# EAGLE board TSL2561_Luminosity_Sensor_BOB-Panel-v10 (EAGLE 6.5.0), part 1 of 2
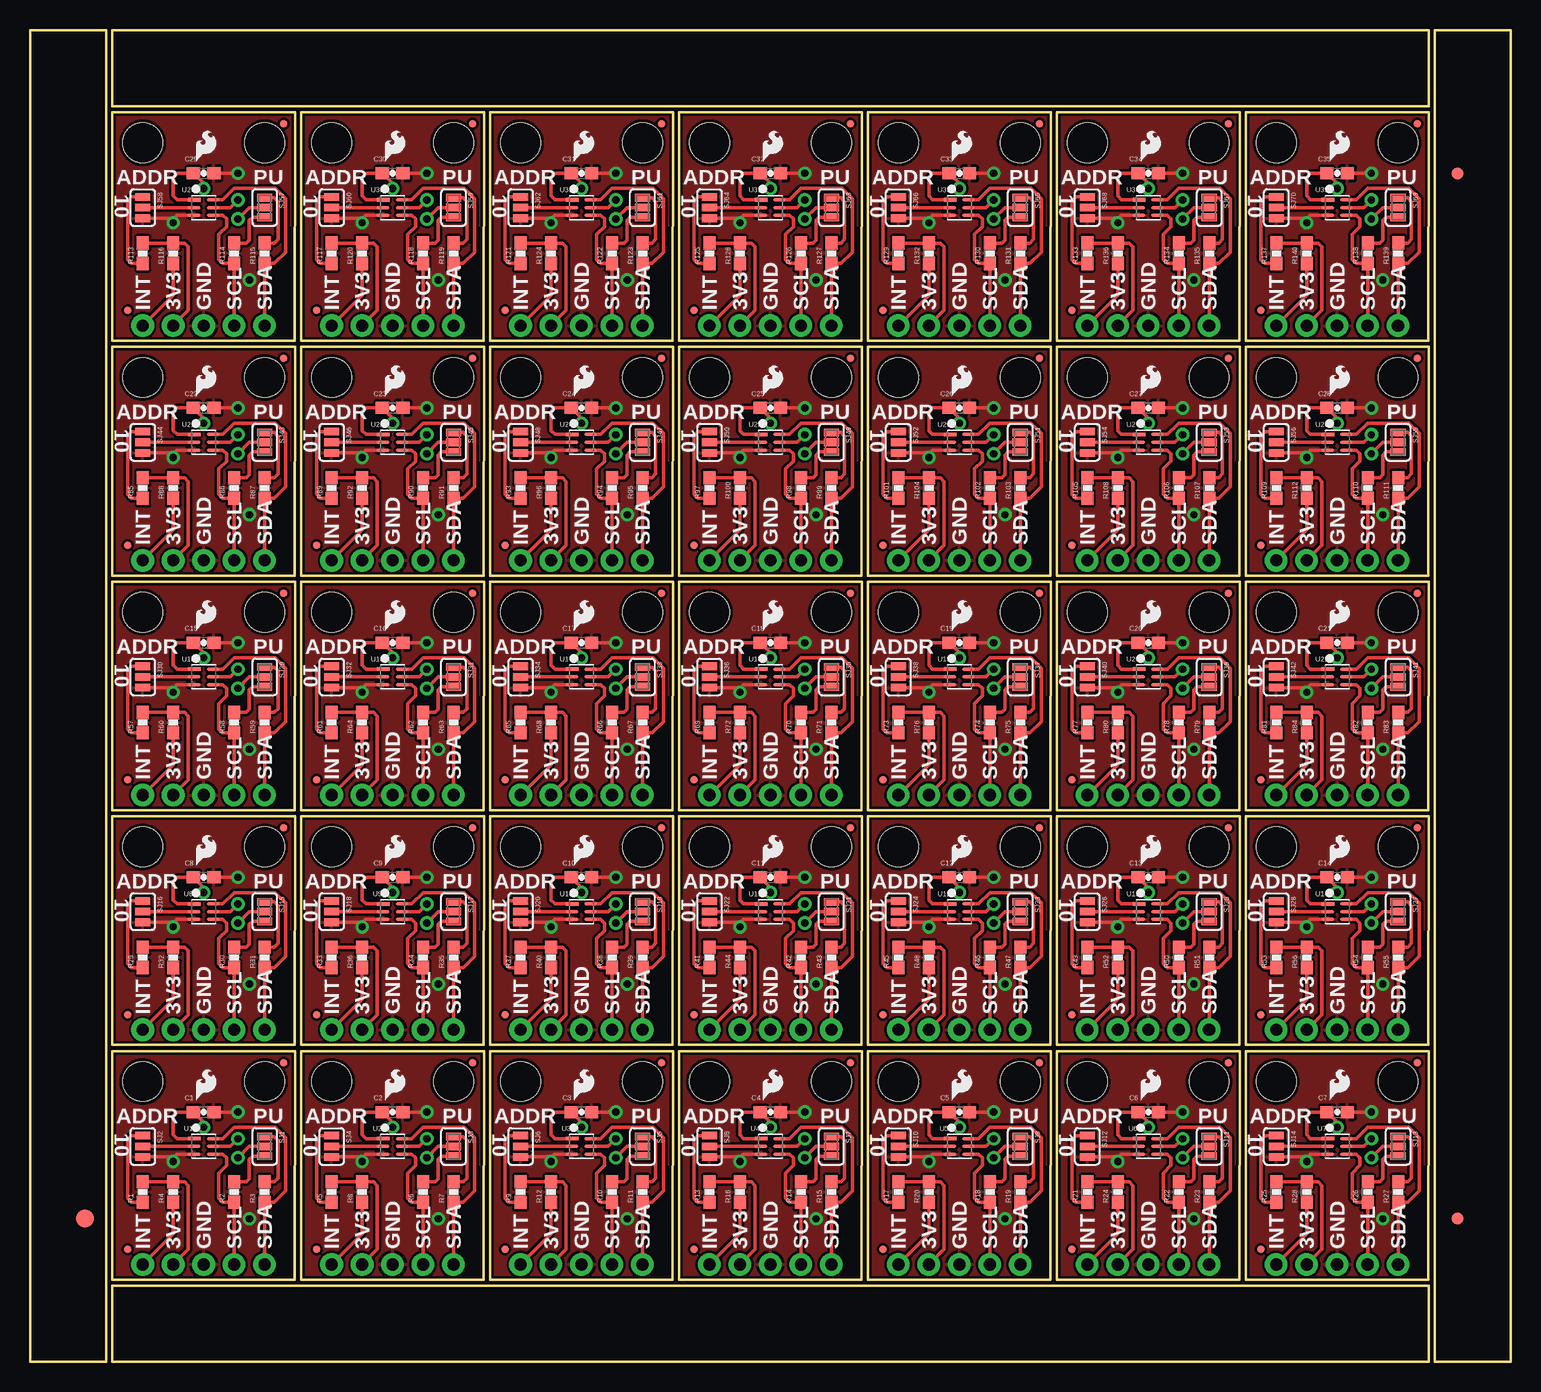
[diagram p0: board, top side]
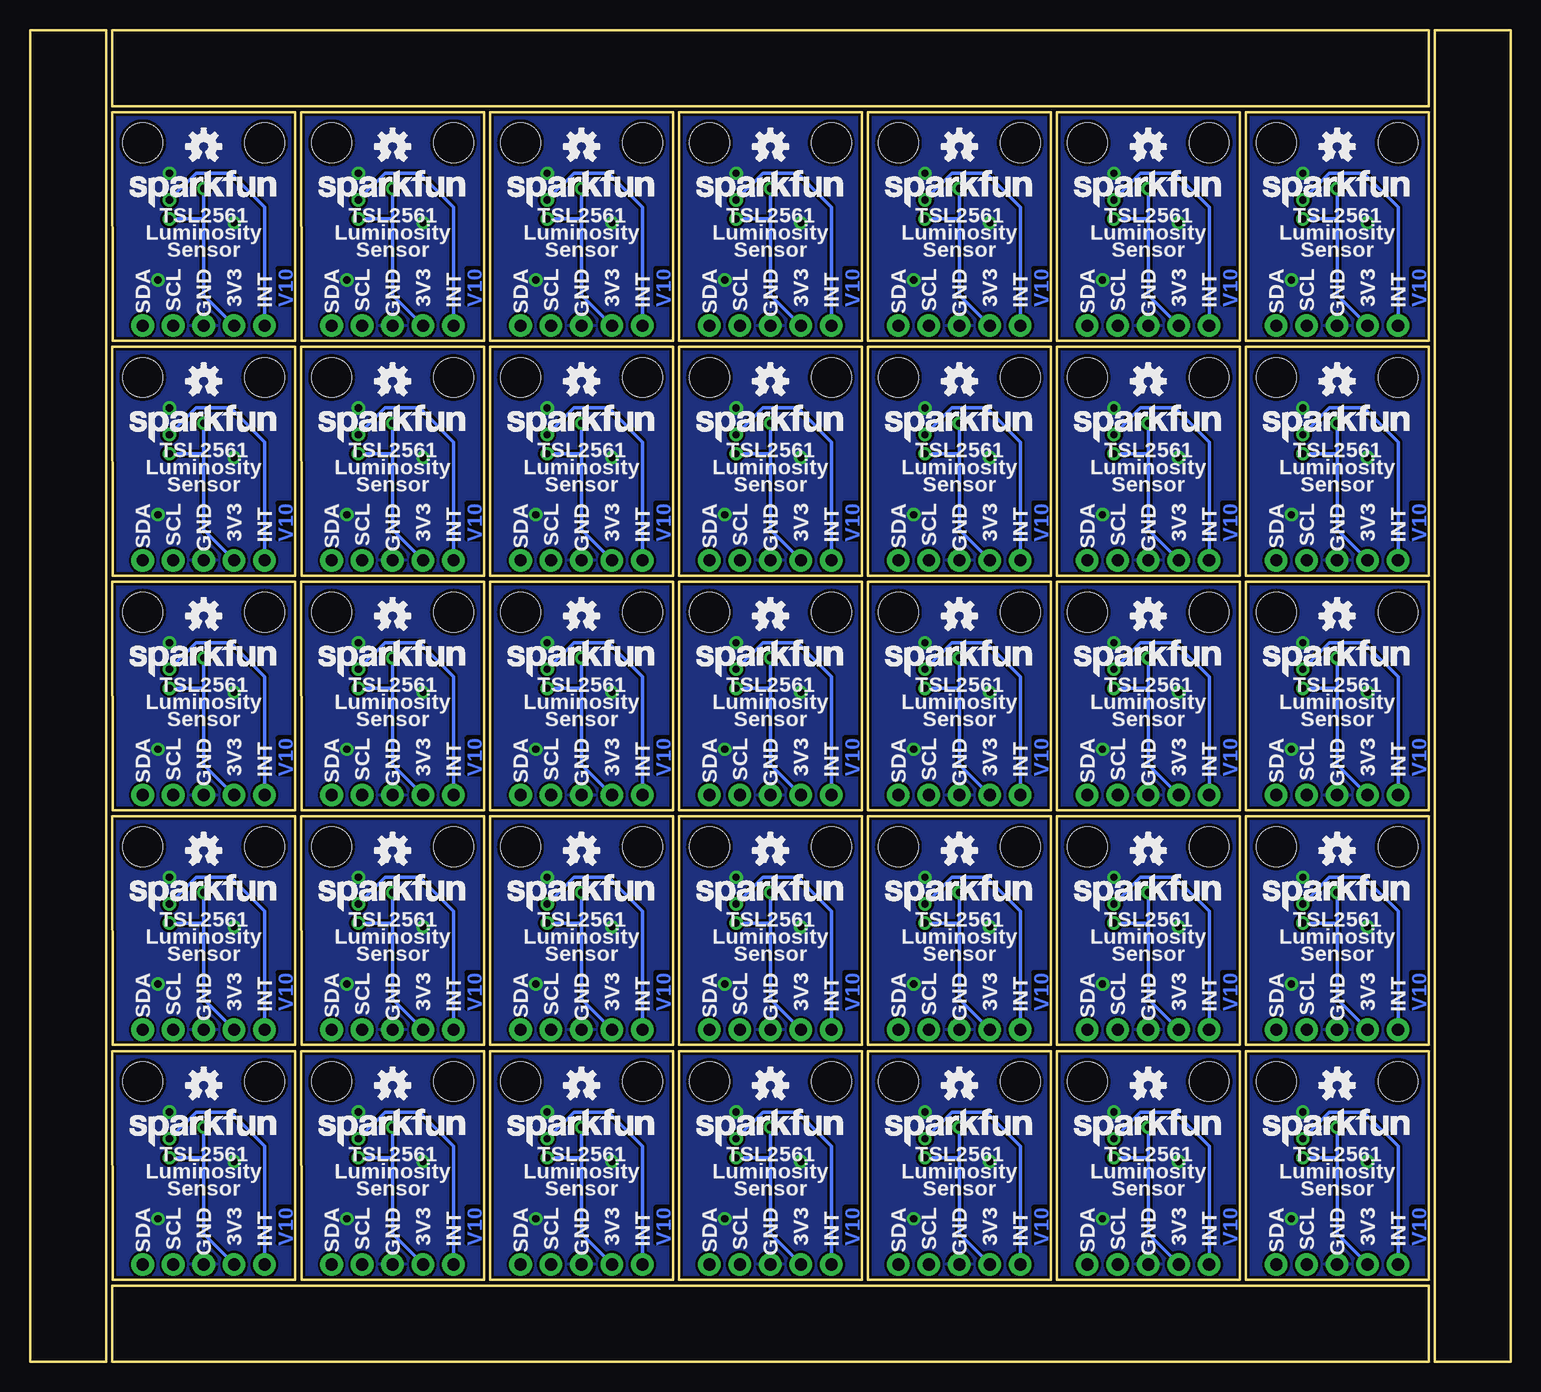
[diagram p1: board, bottom side, seen from below]

Size 123.44 x 111 mm. Coordinates in mm from the lower left corner, seen from the top.
Outline: 6.86,6.86 22.08,6.86 22.1,25.91 6.86,25.91 6.86,6.86
Outline: 22.61,6.86 37.83,6.86 37.85,25.91 22.61,25.91 22.61,6.86
Outline: 38.35,6.86 53.57,6.86 53.59,25.91 38.35,25.91 38.35,6.86
Outline: 54.1,6.86 69.32,6.86 69.34,25.91 54.1,25.91 54.1,6.86
Outline: 69.85,6.86 85.07,6.86 85.09,25.91 69.85,25.91 69.85,6.86
Outline: 85.6,6.86 100.82,6.86 100.84,25.91 85.6,25.91 85.6,6.86
Outline: 101.35,6.86 116.57,6.86 116.59,25.91 101.35,25.91 101.35,6.86
Outline: 6.86,26.42 22.08,26.42 22.1,45.47 6.86,45.47 6.86,26.42
Outline: 22.61,26.42 37.83,26.42 37.85,45.47 22.61,45.47 22.61,26.42
Outline: 38.35,26.42 53.57,26.42 53.59,45.47 38.35,45.47 38.35,26.42
Outline: 54.1,26.42 69.32,26.42 69.34,45.47 54.1,45.47 54.1,26.42
Outline: 69.85,26.42 85.07,26.42 85.09,45.47 69.85,45.47 69.85,26.42
Outline: 85.6,26.42 100.82,26.42 100.84,45.47 85.6,45.47 85.6,26.42
Outline: 101.35,26.42 116.57,26.42 116.59,45.47 101.35,45.47 101.35,26.42
Outline: 6.86,45.97 22.08,45.97 22.1,65.02 6.86,65.02 6.86,45.97
Outline: 22.61,45.97 37.83,45.97 37.85,65.02 22.61,65.02 22.61,45.97
Outline: 38.35,45.97 53.57,45.97 53.59,65.02 38.35,65.02 38.35,45.97
Outline: 54.1,45.97 69.32,45.97 69.34,65.02 54.1,65.02 54.1,45.97
Outline: 69.85,45.97 85.07,45.97 85.09,65.02 69.85,65.02 69.85,45.97
Outline: 85.6,45.97 100.82,45.97 100.84,65.02 85.6,65.02 85.6,45.97
Outline: 101.35,45.97 116.57,45.97 116.59,65.02 101.35,65.02 101.35,45.97
Outline: 6.86,65.53 22.08,65.53 22.1,84.58 6.86,84.58 6.86,65.53
Outline: 22.61,65.53 37.83,65.53 37.85,84.58 22.61,84.58 22.61,65.53
Outline: 38.35,65.53 53.57,65.53 53.59,84.58 38.35,84.58 38.35,65.53
Outline: 54.1,65.53 69.32,65.53 69.34,84.58 54.1,84.58 54.1,65.53
Outline: 69.85,65.53 85.07,65.53 85.09,84.58 69.85,84.58 69.85,65.53
Outline: 85.6,65.53 100.82,65.53 100.84,84.58 85.6,84.58 85.6,65.53
Outline: 101.35,65.53 116.57,65.53 116.59,84.58 101.35,84.58 101.35,65.53
Outline: 6.86,85.09 22.08,85.09 22.1,104.14 6.86,104.14 6.86,85.09
Outline: 22.61,85.09 37.83,85.09 37.85,104.14 22.61,104.14 22.61,85.09
Outline: 38.35,85.09 53.57,85.09 53.59,104.14 38.35,104.14 38.35,85.09
Outline: 54.1,85.09 69.32,85.09 69.34,104.14 54.1,104.14 54.1,85.09
Outline: 69.85,85.09 85.07,85.09 85.09,104.14 69.85,104.14 69.85,85.09
Outline: 85.6,85.09 100.82,85.09 100.84,104.14 85.6,104.14 85.6,85.09
Outline: 101.35,85.09 116.57,85.09 116.59,104.14 101.35,104.14 101.35,85.09
Outline: 6.35,0 6.35,111 0,111 0,0 6.35,0
Outline: 6.86,0 116.59,0 116.59,6.35 6.86,6.35 6.86,0
Outline: 123.44,0 123.44,111 117.09,111 117.09,0 123.44,0
Outline: 116.59,111 6.86,111 6.86,104.65 116.59,104.65 116.59,111
Copper layers (1*16): Top 0.035mm / dielectric 1.5mm / Bottom 0.035mm
Design rules "SparkFun": minimum track width 7mil, minimum drill 15mil, track to track 8mil, track to pad 8mil, pad to pad 8mil, via to via 8mil, smd to smd 8mil, copper to edge 8mil, drill to drill 8mil, minimum pad ring 12mil, minimum via ring 10mil, stop-mask expansion 4mil, vias tented up to drill 20mil, thermal gap 10mil

## Footprints (pad centres in the part's own frame; a part is rotated, then mirrored left to right if it is on the bottom)
0603-CAP = smd 1.1 x 1: 1 -0.85,0; 2 0.85,0
FIDUCIAL-1.5X3 = smd 1.5 x 1.5: 1 0,0
FIDUCIAL-1X2 = smd 1 x 1: 1 0,0
MICRO-FIDUCIAL = smd 0.635 x 0.635: 1 0,0
1X05_ROUNDONLY_NOSILK = drill 1.016 pad 1.88: 1 0,0; 2 2.54,0; 3 5.08,0; 4 7.62,0; 5 10.16,0
0603-RES = smd 1.1 x 1: 1 -0.85,0; 2 0.85,0
SJ_3_PASTE1&2&3 = smd 0.635 x 1.27: 1 -0.813,0; 2 0,0; 3 0.813,0
SJ_3 = smd 0.635 x 1.27: 1 -0.889,0; 2 0,0; 3 0.889,0
STAND-OFF = hole 3.302: 0,0
FN-6 = smd 1.05 x 0.3: 1 -0.775,0.65; 2 -0.775,0; 3 -0.775,-0.65; 4 0.775,-0.65; 5 0.775,0; 6 0.775,0.65

## Placement (x,y rotation side)
C1  0.1uF  [0603-CAP]  14.48,20.83 0 top
C2  0.1uF  [0603-CAP]  30.23,20.83 0 top
C3  0.1uF  [0603-CAP]  45.97,20.83 0 top
C4  0.1uF  [0603-CAP]  61.72,20.83 0 top
C5  0.1uF  [0603-CAP]  77.47,20.83 0 top
C6  0.1uF  [0603-CAP]  93.22,20.83 0 top
C7  0.1uF  [0603-CAP]  108.97,20.83 0 top
C8  0.1uF  [0603-CAP]  14.48,40.39 0 top
C9  0.1uF  [0603-CAP]  30.23,40.39 0 top
C10  0.1uF  [0603-CAP]  45.97,40.39 0 top
C11  0.1uF  [0603-CAP]  61.72,40.39 0 top
C12  0.1uF  [0603-CAP]  77.47,40.39 0 top
C13  0.1uF  [0603-CAP]  93.22,40.39 0 top
C14  0.1uF  [0603-CAP]  108.97,40.39 0 top
C15  0.1uF  [0603-CAP]  14.48,59.94 0 top
C16  0.1uF  [0603-CAP]  30.23,59.94 0 top
C17  0.1uF  [0603-CAP]  45.97,59.94 0 top
C18  0.1uF  [0603-CAP]  61.72,59.94 0 top
C19  0.1uF  [0603-CAP]  77.47,59.94 0 top
C20  0.1uF  [0603-CAP]  93.22,59.94 0 top
C21  0.1uF  [0603-CAP]  108.97,59.94 0 top
C22  0.1uF  [0603-CAP]  14.48,79.5 0 top
C23  0.1uF  [0603-CAP]  30.23,79.5 0 top
C24  0.1uF  [0603-CAP]  45.97,79.5 0 top
C25  0.1uF  [0603-CAP]  61.72,79.5 0 top
C26  0.1uF  [0603-CAP]  77.47,79.5 0 top
C27  0.1uF  [0603-CAP]  93.22,79.5 0 top
C28  0.1uF  [0603-CAP]  108.97,79.5 0 top
C29  0.1uF  [0603-CAP]  14.48,99.06 0 top
C30  0.1uF  [0603-CAP]  30.23,99.06 0 top
C31  0.1uF  [0603-CAP]  45.97,99.06 0 top
C32  0.1uF  [0603-CAP]  61.72,99.06 0 top
C33  0.1uF  [0603-CAP]  77.47,99.06 0 top
C34  0.1uF  [0603-CAP]  93.22,99.06 0 top
C35  0.1uF  [0603-CAP]  108.97,99.06 0 top
E$1  [FIDUCIAL-1.5X3]  4.57,11.94 0 top
E$4  [FIDUCIAL-1X2]  119,11.94 0 top
E$5  [FIDUCIAL-1X2]  119,99.06 180 top
FID1  FIDUCIALUFIDUCIAL  [MICRO-FIDUCIAL]  8.13,9.4 0 top
FID2  FIDUCIALUFIDUCIAL  [MICRO-FIDUCIAL]  21.15,24.96 0 top
FID3  FIDUCIALUFIDUCIAL  [MICRO-FIDUCIAL]  23.88,9.4 0 top
FID4  FIDUCIALUFIDUCIAL  [MICRO-FIDUCIAL]  36.89,24.96 0 top
FID5  FIDUCIALUFIDUCIAL  [MICRO-FIDUCIAL]  39.62,9.4 0 top
FID6  FIDUCIALUFIDUCIAL  [MICRO-FIDUCIAL]  52.64,24.96 0 top
FID7  FIDUCIALUFIDUCIAL  [MICRO-FIDUCIAL]  55.37,9.4 0 top
FID8  FIDUCIALUFIDUCIAL  [MICRO-FIDUCIAL]  68.39,24.96 0 top
FID9  FIDUCIALUFIDUCIAL  [MICRO-FIDUCIAL]  71.12,9.4 0 top
FID10  FIDUCIALUFIDUCIAL  [MICRO-FIDUCIAL]  84.14,24.96 0 top
FID11  FIDUCIALUFIDUCIAL  [MICRO-FIDUCIAL]  86.87,9.4 0 top
FID12  FIDUCIALUFIDUCIAL  [MICRO-FIDUCIAL]  99.89,24.96 0 top
FID13  FIDUCIALUFIDUCIAL  [MICRO-FIDUCIAL]  102.62,9.4 0 top
FID14  FIDUCIALUFIDUCIAL  [MICRO-FIDUCIAL]  115.63,24.96 0 top
FID15  FIDUCIALUFIDUCIAL  [MICRO-FIDUCIAL]  8.13,28.96 0 top
FID16  FIDUCIALUFIDUCIAL  [MICRO-FIDUCIAL]  21.15,44.51 0 top
FID17  FIDUCIALUFIDUCIAL  [MICRO-FIDUCIAL]  23.88,28.96 0 top
FID18  FIDUCIALUFIDUCIAL  [MICRO-FIDUCIAL]  36.89,44.51 0 top
FID19  FIDUCIALUFIDUCIAL  [MICRO-FIDUCIAL]  39.62,28.96 0 top
FID20  FIDUCIALUFIDUCIAL  [MICRO-FIDUCIAL]  52.64,44.51 0 top
FID21  FIDUCIALUFIDUCIAL  [MICRO-FIDUCIAL]  55.37,28.96 0 top
FID22  FIDUCIALUFIDUCIAL  [MICRO-FIDUCIAL]  68.39,44.51 0 top
FID23  FIDUCIALUFIDUCIAL  [MICRO-FIDUCIAL]  71.12,28.96 0 top
FID24  FIDUCIALUFIDUCIAL  [MICRO-FIDUCIAL]  84.14,44.51 0 top
FID25  FIDUCIALUFIDUCIAL  [MICRO-FIDUCIAL]  86.87,28.96 0 top
FID26  FIDUCIALUFIDUCIAL  [MICRO-FIDUCIAL]  99.89,44.51 0 top
FID27  FIDUCIALUFIDUCIAL  [MICRO-FIDUCIAL]  102.62,28.96 0 top
FID28  FIDUCIALUFIDUCIAL  [MICRO-FIDUCIAL]  115.63,44.51 0 top
FID29  FIDUCIALUFIDUCIAL  [MICRO-FIDUCIAL]  8.13,48.51 0 top
FID30  FIDUCIALUFIDUCIAL  [MICRO-FIDUCIAL]  21.15,64.07 0 top
FID31  FIDUCIALUFIDUCIAL  [MICRO-FIDUCIAL]  23.88,48.51 0 top
FID32  FIDUCIALUFIDUCIAL  [MICRO-FIDUCIAL]  36.89,64.07 0 top
FID33  FIDUCIALUFIDUCIAL  [MICRO-FIDUCIAL]  39.62,48.51 0 top
FID34  FIDUCIALUFIDUCIAL  [MICRO-FIDUCIAL]  52.64,64.07 0 top
FID35  FIDUCIALUFIDUCIAL  [MICRO-FIDUCIAL]  55.37,48.51 0 top
FID36  FIDUCIALUFIDUCIAL  [MICRO-FIDUCIAL]  68.39,64.07 0 top
FID37  FIDUCIALUFIDUCIAL  [MICRO-FIDUCIAL]  71.12,48.51 0 top
FID38  FIDUCIALUFIDUCIAL  [MICRO-FIDUCIAL]  84.14,64.07 0 top
FID39  FIDUCIALUFIDUCIAL  [MICRO-FIDUCIAL]  86.87,48.51 0 top
FID40  FIDUCIALUFIDUCIAL  [MICRO-FIDUCIAL]  99.89,64.07 0 top
FID41  FIDUCIALUFIDUCIAL  [MICRO-FIDUCIAL]  102.62,48.51 0 top
FID42  FIDUCIALUFIDUCIAL  [MICRO-FIDUCIAL]  115.63,64.07 0 top
FID43  FIDUCIALUFIDUCIAL  [MICRO-FIDUCIAL]  8.13,68.07 0 top
FID44  FIDUCIALUFIDUCIAL  [MICRO-FIDUCIAL]  21.15,83.63 0 top
FID45  FIDUCIALUFIDUCIAL  [MICRO-FIDUCIAL]  23.88,68.07 0 top
FID46  FIDUCIALUFIDUCIAL  [MICRO-FIDUCIAL]  36.89,83.63 0 top
FID47  FIDUCIALUFIDUCIAL  [MICRO-FIDUCIAL]  39.62,68.07 0 top
FID48  FIDUCIALUFIDUCIAL  [MICRO-FIDUCIAL]  52.64,83.63 0 top
FID49  FIDUCIALUFIDUCIAL  [MICRO-FIDUCIAL]  55.37,68.07 0 top
FID50  FIDUCIALUFIDUCIAL  [MICRO-FIDUCIAL]  68.39,83.63 0 top
FID51  FIDUCIALUFIDUCIAL  [MICRO-FIDUCIAL]  71.12,68.07 0 top
FID52  FIDUCIALUFIDUCIAL  [MICRO-FIDUCIAL]  84.14,83.63 0 top
FID53  FIDUCIALUFIDUCIAL  [MICRO-FIDUCIAL]  86.87,68.07 0 top
FID54  FIDUCIALUFIDUCIAL  [MICRO-FIDUCIAL]  99.89,83.63 0 top
FID55  FIDUCIALUFIDUCIAL  [MICRO-FIDUCIAL]  102.62,68.07 0 top
FID56  FIDUCIALUFIDUCIAL  [MICRO-FIDUCIAL]  115.63,83.63 0 top
FID57  FIDUCIALUFIDUCIAL  [MICRO-FIDUCIAL]  8.13,87.63 0 top
FID58  FIDUCIALUFIDUCIAL  [MICRO-FIDUCIAL]  21.15,103.19 0 top
FID59  FIDUCIALUFIDUCIAL  [MICRO-FIDUCIAL]  23.88,87.63 0 top
FID60  FIDUCIALUFIDUCIAL  [MICRO-FIDUCIAL]  36.89,103.19 0 top
FID61  FIDUCIALUFIDUCIAL  [MICRO-FIDUCIAL]  39.62,87.63 0 top
FID62  FIDUCIALUFIDUCIAL  [MICRO-FIDUCIAL]  52.64,103.19 0 top
FID63  FIDUCIALUFIDUCIAL  [MICRO-FIDUCIAL]  55.37,87.63 0 top
FID64  FIDUCIALUFIDUCIAL  [MICRO-FIDUCIAL]  68.39,103.19 0 top
FID65  FIDUCIALUFIDUCIAL  [MICRO-FIDUCIAL]  71.12,87.63 0 top
FID66  FIDUCIALUFIDUCIAL  [MICRO-FIDUCIAL]  84.14,103.19 0 top
FID67  FIDUCIALUFIDUCIAL  [MICRO-FIDUCIAL]  86.87,87.63 0 top
FID68  FIDUCIALUFIDUCIAL  [MICRO-FIDUCIAL]  99.89,103.19 0 top
FID69  FIDUCIALUFIDUCIAL  [MICRO-FIDUCIAL]  102.62,87.63 0 top
FID70  FIDUCIALUFIDUCIAL  [MICRO-FIDUCIAL]  115.63,103.19 0 top
JP1  [1X05_ROUNDONLY_NOSILK]  19.56,8.13 180 top
JP2  [1X05_ROUNDONLY_NOSILK]  35.31,8.13 180 top
JP3  [1X05_ROUNDONLY_NOSILK]  51.05,8.13 180 top
JP4  [1X05_ROUNDONLY_NOSILK]  66.8,8.13 180 top
JP5  [1X05_ROUNDONLY_NOSILK]  82.55,8.13 180 top
JP6  [1X05_ROUNDONLY_NOSILK]  98.3,8.13 180 top
JP7  [1X05_ROUNDONLY_NOSILK]  114.05,8.13 180 top
JP8  [1X05_ROUNDONLY_NOSILK]  19.56,27.69 180 top
JP9  [1X05_ROUNDONLY_NOSILK]  35.31,27.69 180 top
JP10  [1X05_ROUNDONLY_NOSILK]  51.05,27.69 180 top
JP11  [1X05_ROUNDONLY_NOSILK]  66.8,27.69 180 top
JP12  [1X05_ROUNDONLY_NOSILK]  82.55,27.69 180 top
JP13  [1X05_ROUNDONLY_NOSILK]  98.3,27.69 180 top
JP14  [1X05_ROUNDONLY_NOSILK]  114.05,27.69 180 top
JP15  [1X05_ROUNDONLY_NOSILK]  19.56,47.24 180 top
JP16  [1X05_ROUNDONLY_NOSILK]  35.31,47.24 180 top
JP17  [1X05_ROUNDONLY_NOSILK]  51.05,47.24 180 top
JP18  [1X05_ROUNDONLY_NOSILK]  66.8,47.24 180 top
JP19  [1X05_ROUNDONLY_NOSILK]  82.55,47.24 180 top
JP20  [1X05_ROUNDONLY_NOSILK]  98.3,47.24 180 top
JP21  [1X05_ROUNDONLY_NOSILK]  114.05,47.24 180 top
JP22  [1X05_ROUNDONLY_NOSILK]  19.56,66.8 180 top
JP23  [1X05_ROUNDONLY_NOSILK]  35.31,66.8 180 top
JP24  [1X05_ROUNDONLY_NOSILK]  51.05,66.8 180 top
JP25  [1X05_ROUNDONLY_NOSILK]  66.8,66.8 180 top
JP26  [1X05_ROUNDONLY_NOSILK]  82.55,66.8 180 top
JP27  [1X05_ROUNDONLY_NOSILK]  98.3,66.8 180 top
JP28  [1X05_ROUNDONLY_NOSILK]  114.05,66.8 180 top
JP29  [1X05_ROUNDONLY_NOSILK]  19.56,86.36 180 top
JP30  [1X05_ROUNDONLY_NOSILK]  35.31,86.36 180 top
JP31  [1X05_ROUNDONLY_NOSILK]  51.05,86.36 180 top
JP32  [1X05_ROUNDONLY_NOSILK]  66.8,86.36 180 top
JP33  [1X05_ROUNDONLY_NOSILK]  82.55,86.36 180 top
JP34  [1X05_ROUNDONLY_NOSILK]  98.3,86.36 180 top
JP35  [1X05_ROUNDONLY_NOSILK]  114.05,86.36 180 top
LOGO1  OSHW-LOGOS  [OSHW-LOGO-S]  14.48,23.05 0 bottom
LOGO2  LOGO-SFENW2  [SFE-NEW-WEB]  20.67,17.97 0 bottom
LOGO3  SFE_LOGO_FLAME.1_INCH  [SFE_LOGO_FLAME_.1]  13.53,21.46 0 top
LOGO4  OSHW-LOGOS  [OSHW-LOGO-S]  30.23,23.05 0 bottom
LOGO5  LOGO-SFENW2  [SFE-NEW-WEB]  36.42,17.97 0 bottom
LOGO6  SFE_LOGO_FLAME.1_INCH  [SFE_LOGO_FLAME_.1]  29.27,21.46 0 top
LOGO7  OSHW-LOGOS  [OSHW-LOGO-S]  45.97,23.05 0 bottom
LOGO8  LOGO-SFENW2  [SFE-NEW-WEB]  52.17,17.97 0 bottom
LOGO9  SFE_LOGO_FLAME.1_INCH  [SFE_LOGO_FLAME_.1]  45.02,21.46 0 top
LOGO10  OSHW-LOGOS  [OSHW-LOGO-S]  61.72,23.05 0 bottom
LOGO11  LOGO-SFENW2  [SFE-NEW-WEB]  67.91,17.97 0 bottom
LOGO12  SFE_LOGO_FLAME.1_INCH  [SFE_LOGO_FLAME_.1]  60.77,21.46 0 top
LOGO13  OSHW-LOGOS  [OSHW-LOGO-S]  77.47,23.05 0 bottom
LOGO14  LOGO-SFENW2  [SFE-NEW-WEB]  83.66,17.97 0 bottom
LOGO15  SFE_LOGO_FLAME.1_INCH  [SFE_LOGO_FLAME_.1]  76.52,21.46 0 top
LOGO16  OSHW-LOGOS  [OSHW-LOGO-S]  93.22,23.05 0 bottom
LOGO17  LOGO-SFENW2  [SFE-NEW-WEB]  99.41,17.97 0 bottom
LOGO18  SFE_LOGO_FLAME.1_INCH  [SFE_LOGO_FLAME_.1]  92.27,21.46 0 top
LOGO19  OSHW-LOGOS  [OSHW-LOGO-S]  108.97,23.05 0 bottom
LOGO20  LOGO-SFENW2  [SFE-NEW-WEB]  115.16,17.97 0 bottom
LOGO21  SFE_LOGO_FLAME.1_INCH  [SFE_LOGO_FLAME_.1]  108.01,21.46 0 top
LOGO22  OSHW-LOGOS  [OSHW-LOGO-S]  14.48,42.61 0 bottom
LOGO23  LOGO-SFENW2  [SFE-NEW-WEB]  20.67,37.53 0 bottom
LOGO24  SFE_LOGO_FLAME.1_INCH  [SFE_LOGO_FLAME_.1]  13.53,41.02 0 top
LOGO25  OSHW-LOGOS  [OSHW-LOGO-S]  30.23,42.61 0 bottom
LOGO26  LOGO-SFENW2  [SFE-NEW-WEB]  36.42,37.53 0 bottom
LOGO27  SFE_LOGO_FLAME.1_INCH  [SFE_LOGO_FLAME_.1]  29.27,41.02 0 top
LOGO28  OSHW-LOGOS  [OSHW-LOGO-S]  45.97,42.61 0 bottom
LOGO29  LOGO-SFENW2  [SFE-NEW-WEB]  52.17,37.53 0 bottom
LOGO30  SFE_LOGO_FLAME.1_INCH  [SFE_LOGO_FLAME_.1]  45.02,41.02 0 top
LOGO31  OSHW-LOGOS  [OSHW-LOGO-S]  61.72,42.61 0 bottom
LOGO32  LOGO-SFENW2  [SFE-NEW-WEB]  67.91,37.53 0 bottom
LOGO33  SFE_LOGO_FLAME.1_INCH  [SFE_LOGO_FLAME_.1]  60.77,41.02 0 top
LOGO34  OSHW-LOGOS  [OSHW-LOGO-S]  77.47,42.61 0 bottom
LOGO35  LOGO-SFENW2  [SFE-NEW-WEB]  83.66,37.53 0 bottom
LOGO36  SFE_LOGO_FLAME.1_INCH  [SFE_LOGO_FLAME_.1]  76.52,41.02 0 top
LOGO37  OSHW-LOGOS  [OSHW-LOGO-S]  93.22,42.61 0 bottom
LOGO38  LOGO-SFENW2  [SFE-NEW-WEB]  99.41,37.53 0 bottom
LOGO39  SFE_LOGO_FLAME.1_INCH  [SFE_LOGO_FLAME_.1]  92.27,41.02 0 top
LOGO40  OSHW-LOGOS  [OSHW-LOGO-S]  108.97,42.61 0 bottom
LOGO41  LOGO-SFENW2  [SFE-NEW-WEB]  115.16,37.53 0 bottom
LOGO42  SFE_LOGO_FLAME.1_INCH  [SFE_LOGO_FLAME_.1]  108.01,41.02 0 top
LOGO43  OSHW-LOGOS  [OSHW-LOGO-S]  14.48,62.17 0 bottom
LOGO44  LOGO-SFENW2  [SFE-NEW-WEB]  20.67,57.09 0 bottom
LOGO45  SFE_LOGO_FLAME.1_INCH  [SFE_LOGO_FLAME_.1]  13.53,60.58 0 top
LOGO46  OSHW-LOGOS  [OSHW-LOGO-S]  30.23,62.17 0 bottom
LOGO47  LOGO-SFENW2  [SFE-NEW-WEB]  36.42,57.09 0 bottom
LOGO48  SFE_LOGO_FLAME.1_INCH  [SFE_LOGO_FLAME_.1]  29.27,60.58 0 top
LOGO49  OSHW-LOGOS  [OSHW-LOGO-S]  45.97,62.17 0 bottom
LOGO50  LOGO-SFENW2  [SFE-NEW-WEB]  52.17,57.09 0 bottom
LOGO51  SFE_LOGO_FLAME.1_INCH  [SFE_LOGO_FLAME_.1]  45.02,60.58 0 top
LOGO52  OSHW-LOGOS  [OSHW-LOGO-S]  61.72,62.17 0 bottom
LOGO53  LOGO-SFENW2  [SFE-NEW-WEB]  67.91,57.09 0 bottom
LOGO54  SFE_LOGO_FLAME.1_INCH  [SFE_LOGO_FLAME_.1]  60.77,60.58 0 top
LOGO55  OSHW-LOGOS  [OSHW-LOGO-S]  77.47,62.17 0 bottom
LOGO56  LOGO-SFENW2  [SFE-NEW-WEB]  83.66,57.09 0 bottom
LOGO57  SFE_LOGO_FLAME.1_INCH  [SFE_LOGO_FLAME_.1]  76.52,60.58 0 top
LOGO58  OSHW-LOGOS  [OSHW-LOGO-S]  93.22,62.17 0 bottom
LOGO59  LOGO-SFENW2  [SFE-NEW-WEB]  99.41,57.09 0 bottom
LOGO60  SFE_LOGO_FLAME.1_INCH  [SFE_LOGO_FLAME_.1]  92.27,60.58 0 top
LOGO61  OSHW-LOGOS  [OSHW-LOGO-S]  108.97,62.17 0 bottom
LOGO62  LOGO-SFENW2  [SFE-NEW-WEB]  115.16,57.09 0 bottom
LOGO63  SFE_LOGO_FLAME.1_INCH  [SFE_LOGO_FLAME_.1]  108.01,60.58 0 top
LOGO64  OSHW-LOGOS  [OSHW-LOGO-S]  14.48,81.72 0 bottom
LOGO65  LOGO-SFENW2  [SFE-NEW-WEB]  20.67,76.64 0 bottom
LOGO66  SFE_LOGO_FLAME.1_INCH  [SFE_LOGO_FLAME_.1]  13.53,80.14 0 top
LOGO67  OSHW-LOGOS  [OSHW-LOGO-S]  30.23,81.72 0 bottom
LOGO68  LOGO-SFENW2  [SFE-NEW-WEB]  36.42,76.64 0 bottom
LOGO69  SFE_LOGO_FLAME.1_INCH  [SFE_LOGO_FLAME_.1]  29.27,80.14 0 top
LOGO70  OSHW-LOGOS  [OSHW-LOGO-S]  45.97,81.72 0 bottom
LOGO71  LOGO-SFENW2  [SFE-NEW-WEB]  52.17,76.64 0 bottom
LOGO72  SFE_LOGO_FLAME.1_INCH  [SFE_LOGO_FLAME_.1]  45.02,80.14 0 top
LOGO73  OSHW-LOGOS  [OSHW-LOGO-S]  61.72,81.72 0 bottom
LOGO74  LOGO-SFENW2  [SFE-NEW-WEB]  67.91,76.64 0 bottom
LOGO75  SFE_LOGO_FLAME.1_INCH  [SFE_LOGO_FLAME_.1]  60.77,80.14 0 top
LOGO76  OSHW-LOGOS  [OSHW-LOGO-S]  77.47,81.72 0 bottom
LOGO77  LOGO-SFENW2  [SFE-NEW-WEB]  83.66,76.64 0 bottom
LOGO78  SFE_LOGO_FLAME.1_INCH  [SFE_LOGO_FLAME_.1]  76.52,80.14 0 top
LOGO79  OSHW-LOGOS  [OSHW-LOGO-S]  93.22,81.72 0 bottom
LOGO80  LOGO-SFENW2  [SFE-NEW-WEB]  99.41,76.64 0 bottom
LOGO81  SFE_LOGO_FLAME.1_INCH  [SFE_LOGO_FLAME_.1]  92.27,80.14 0 top
LOGO82  OSHW-LOGOS  [OSHW-LOGO-S]  108.97,81.72 0 bottom
LOGO83  LOGO-SFENW2  [SFE-NEW-WEB]  115.16,76.64 0 bottom
LOGO84  SFE_LOGO_FLAME.1_INCH  [SFE_LOGO_FLAME_.1]  108.01,80.14 0 top
LOGO85  OSHW-LOGOS  [OSHW-LOGO-S]  14.48,101.28 0 bottom
LOGO86  LOGO-SFENW2  [SFE-NEW-WEB]  20.67,96.2 0 bottom
LOGO87  SFE_LOGO_FLAME.1_INCH  [SFE_LOGO_FLAME_.1]  13.53,99.69 0 top
LOGO88  OSHW-LOGOS  [OSHW-LOGO-S]  30.23,101.28 0 bottom
LOGO89  LOGO-SFENW2  [SFE-NEW-WEB]  36.42,96.2 0 bottom
LOGO90  SFE_LOGO_FLAME.1_INCH  [SFE_LOGO_FLAME_.1]  29.27,99.69 0 top
LOGO91  OSHW-LOGOS  [OSHW-LOGO-S]  45.97,101.28 0 bottom
LOGO92  LOGO-SFENW2  [SFE-NEW-WEB]  52.17,96.2 0 bottom
LOGO93  SFE_LOGO_FLAME.1_INCH  [SFE_LOGO_FLAME_.1]  45.02,99.69 0 top
LOGO94  OSHW-LOGOS  [OSHW-LOGO-S]  61.72,101.28 0 bottom
LOGO95  LOGO-SFENW2  [SFE-NEW-WEB]  67.91,96.2 0 bottom
LOGO96  SFE_LOGO_FLAME.1_INCH  [SFE_LOGO_FLAME_.1]  60.77,99.69 0 top
LOGO97  OSHW-LOGOS  [OSHW-LOGO-S]  77.47,101.28 0 bottom
LOGO98  LOGO-SFENW2  [SFE-NEW-WEB]  83.66,96.2 0 bottom
LOGO99  SFE_LOGO_FLAME.1_INCH  [SFE_LOGO_FLAME_.1]  76.52,99.69 0 top
LOGO100  OSHW-LOGOS  [OSHW-LOGO-S]  93.22,101.28 0 bottom
LOGO101  LOGO-SFENW2  [SFE-NEW-WEB]  99.41,96.2 0 bottom
LOGO102  SFE_LOGO_FLAME.1_INCH  [SFE_LOGO_FLAME_.1]  92.27,99.69 0 top
LOGO103  OSHW-LOGOS  [OSHW-LOGO-S]  108.97,101.28 0 bottom
LOGO104  LOGO-SFENW2  [SFE-NEW-WEB]  115.16,96.2 0 bottom
LOGO105  SFE_LOGO_FLAME.1_INCH  [SFE_LOGO_FLAME_.1]  108.01,99.69 0 top
R1  10K  [0603-RES]  9.4,14.16 90 top
R2  4.7K  [0603-RES]  17.02,14.16 90 top
R3  4.7K  [0603-RES]  19.56,14.16 90 top
R4  10K  [0603-RES]  11.94,14.16 90 top
R5  10K  [0603-RES]  25.15,14.16 90 top
R6  4.7K  [0603-RES]  32.77,14.16 90 top
R7  4.7K  [0603-RES]  35.31,14.16 90 top
R8  10K  [0603-RES]  27.69,14.16 90 top
R9  10K  [0603-RES]  40.89,14.16 90 top
R10  4.7K  [0603-RES]  48.51,14.16 90 top
R11  4.7K  [0603-RES]  51.05,14.16 90 top
R12  10K  [0603-RES]  43.43,14.16 90 top
R13  10K  [0603-RES]  56.64,14.16 90 top
R14  4.7K  [0603-RES]  64.26,14.16 90 top
R15  4.7K  [0603-RES]  66.8,14.16 90 top
R16  10K  [0603-RES]  59.18,14.16 90 top
R17  10K  [0603-RES]  72.39,14.16 90 top
R18  4.7K  [0603-RES]  80.01,14.16 90 top
R19  4.7K  [0603-RES]  82.55,14.16 90 top
R20  10K  [0603-RES]  74.93,14.16 90 top
R21  10K  [0603-RES]  88.14,14.16 90 top
R22  4.7K  [0603-RES]  95.76,14.16 90 top
R23  4.7K  [0603-RES]  98.3,14.16 90 top
R24  10K  [0603-RES]  90.68,14.16 90 top
R25  10K  [0603-RES]  103.89,14.16 90 top
R26  4.7K  [0603-RES]  111.51,14.16 90 top
R27  4.7K  [0603-RES]  114.05,14.16 90 top
R28  10K  [0603-RES]  106.43,14.16 90 top
R29  10K  [0603-RES]  9.4,33.72 90 top
R30  4.7K  [0603-RES]  17.02,33.72 90 top
R31  4.7K  [0603-RES]  19.56,33.72 90 top
R32  10K  [0603-RES]  11.94,33.72 90 top
R33  10K  [0603-RES]  25.15,33.72 90 top
R34  4.7K  [0603-RES]  32.77,33.72 90 top
R35  4.7K  [0603-RES]  35.31,33.72 90 top
R36  10K  [0603-RES]  27.69,33.72 90 top
R37  10K  [0603-RES]  40.89,33.72 90 top
R38  4.7K  [0603-RES]  48.51,33.72 90 top
R39  4.7K  [0603-RES]  51.05,33.72 90 top
R40  10K  [0603-RES]  43.43,33.72 90 top
R41  10K  [0603-RES]  56.64,33.72 90 top
R42  4.7K  [0603-RES]  64.26,33.72 90 top
R43  4.7K  [0603-RES]  66.8,33.72 90 top
R44  10K  [0603-RES]  59.18,33.72 90 top
R45  10K  [0603-RES]  72.39,33.72 90 top
R46  4.7K  [0603-RES]  80.01,33.72 90 top
R47  4.7K  [0603-RES]  82.55,33.72 90 top
R48  10K  [0603-RES]  74.93,33.72 90 top
R49  10K  [0603-RES]  88.14,33.72 90 top
R50  4.7K  [0603-RES]  95.76,33.72 90 top
R51  4.7K  [0603-RES]  98.3,33.72 90 top
R52  10K  [0603-RES]  90.68,33.72 90 top
R53  10K  [0603-RES]  103.89,33.72 90 top
R54  4.7K  [0603-RES]  111.51,33.72 90 top
R55  4.7K  [0603-RES]  114.05,33.72 90 top
R56  10K  [0603-RES]  106.43,33.72 90 top
R57  10K  [0603-RES]  9.4,53.28 90 top
R58  4.7K  [0603-RES]  17.02,53.28 90 top
R59  4.7K  [0603-RES]  19.56,53.28 90 top
R60  10K  [0603-RES]  11.94,53.28 90 top
R61  10K  [0603-RES]  25.15,53.28 90 top
R62  4.7K  [0603-RES]  32.77,53.28 90 top
R63  4.7K  [0603-RES]  35.31,53.28 90 top
R64  10K  [0603-RES]  27.69,53.28 90 top
R65  10K  [0603-RES]  40.89,53.28 90 top
R66  4.7K  [0603-RES]  48.51,53.28 90 top
R67  4.7K  [0603-RES]  51.05,53.28 90 top
R68  10K  [0603-RES]  43.43,53.28 90 top
R69  10K  [0603-RES]  56.64,53.28 90 top
R70  4.7K  [0603-RES]  64.26,53.28 90 top
R71  4.7K  [0603-RES]  66.8,53.28 90 top
R72  10K  [0603-RES]  59.18,53.28 90 top
R73  10K  [0603-RES]  72.39,53.28 90 top
R74  4.7K  [0603-RES]  80.01,53.28 90 top
R75  4.7K  [0603-RES]  82.55,53.28 90 top
R76  10K  [0603-RES]  74.93,53.28 90 top
R77  10K  [0603-RES]  88.14,53.28 90 top
R78  4.7K  [0603-RES]  95.76,53.28 90 top
R79  4.7K  [0603-RES]  98.3,53.28 90 top
R80  10K  [0603-RES]  90.68,53.28 90 top
R81  10K  [0603-RES]  103.89,53.28 90 top
R82  4.7K  [0603-RES]  111.51,53.28 90 top
R83  4.7K  [0603-RES]  114.05,53.28 90 top
R84  10K  [0603-RES]  106.43,53.28 90 top
R85  10K  [0603-RES]  9.4,72.83 90 top
R86  4.7K  [0603-RES]  17.02,72.83 90 top
R87  4.7K  [0603-RES]  19.56,72.83 90 top
R88  10K  [0603-RES]  11.94,72.83 90 top
R89  10K  [0603-RES]  25.15,72.83 90 top
R90  4.7K  [0603-RES]  32.77,72.83 90 top
R91  4.7K  [0603-RES]  35.31,72.83 90 top
R92  10K  [0603-RES]  27.69,72.83 90 top
R93  10K  [0603-RES]  40.89,72.83 90 top
R94  4.7K  [0603-RES]  48.51,72.83 90 top
R95  4.7K  [0603-RES]  51.05,72.83 90 top
R96  10K  [0603-RES]  43.43,72.83 90 top
R97  10K  [0603-RES]  56.64,72.83 90 top
R98  4.7K  [0603-RES]  64.26,72.83 90 top
R99  4.7K  [0603-RES]  66.8,72.83 90 top
R100  10K  [0603-RES]  59.18,72.83 90 top
R101  10K  [0603-RES]  72.39,72.83 90 top
R102  4.7K  [0603-RES]  80.01,72.83 90 top
R103  4.7K  [0603-RES]  82.55,72.83 90 top
R104  10K  [0603-RES]  74.93,72.83 90 top
R105  10K  [0603-RES]  88.14,72.83 90 top
R106  4.7K  [0603-RES]  95.76,72.83 90 top
R107  4.7K  [0603-RES]  98.3,72.83 90 top
R108  10K  [0603-RES]  90.68,72.83 90 top
R109  10K  [0603-RES]  103.89,72.83 90 top
R110  4.7K  [0603-RES]  111.51,72.83 90 top
R111  4.7K  [0603-RES]  114.05,72.83 90 top
R112  10K  [0603-RES]  106.43,72.83 90 top
R113  10K  [0603-RES]  9.4,92.39 90 top
R114  4.7K  [0603-RES]  17.02,92.39 90 top
R115  4.7K  [0603-RES]  19.56,92.39 90 top
R116  10K  [0603-RES]  11.94,92.39 90 top
R117  10K  [0603-RES]  25.15,92.39 90 top
R118  4.7K  [0603-RES]  32.77,92.39 90 top
R119  4.7K  [0603-RES]  35.31,92.39 90 top
R120  10K  [0603-RES]  27.69,92.39 90 top
R121  10K  [0603-RES]  40.89,92.39 90 top
R122  4.7K  [0603-RES]  48.51,92.39 90 top
R123  4.7K  [0603-RES]  51.05,92.39 90 top
R124  10K  [0603-RES]  43.43,92.39 90 top
R125  10K  [0603-RES]  56.64,92.39 90 top
R126  4.7K  [0603-RES]  64.26,92.39 90 top
R127  4.7K  [0603-RES]  66.8,92.39 90 top
R128  10K  [0603-RES]  59.18,92.39 90 top
R129  10K  [0603-RES]  72.39,92.39 90 top
R130  4.7K  [0603-RES]  80.01,92.39 90 top
R131  4.7K  [0603-RES]  82.55,92.39 90 top
R132  10K  [0603-RES]  74.93,92.39 90 top
R133  10K  [0603-RES]  88.14,92.39 90 top
R134  4.7K  [0603-RES]  95.76,92.39 90 top
R135  4.7K  [0603-RES]  98.3,92.39 90 top
R136  10K  [0603-RES]  90.68,92.39 90 top
R137  10K  [0603-RES]  103.89,92.39 90 top
R138  4.7K  [0603-RES]  111.51,92.39 90 top
R139  4.7K  [0603-RES]  114.05,92.39 90 top
R140  10K  [0603-RES]  106.43,92.39 90 top
SJ1  [SJ_3_PASTE1&2&3]  19.56,17.97 270 top
SJ2  [SJ_3]  9.4,17.97 270 top
SJ3  [SJ_3_PASTE1&2&3]  35.31,17.97 270 top
SJ4  [SJ_3]  25.15,17.97 270 top
SJ5  [SJ_3_PASTE1&2&3]  51.05,17.97 270 top
SJ6  [SJ_3]  40.89,17.97 270 top
SJ7  [SJ_3_PASTE1&2&3]  66.8,17.97 270 top
SJ8  [SJ_3]  56.64,17.97 270 top
SJ9  [SJ_3_PASTE1&2&3]  82.55,17.97 270 top
SJ10  [SJ_3]  72.39,17.97 270 top
SJ11  [SJ_3_PASTE1&2&3]  98.3,17.97 270 top
SJ12  [SJ_3]  88.14,17.97 270 top
SJ13  [SJ_3_PASTE1&2&3]  114.05,17.97 270 top
SJ14  [SJ_3]  103.89,17.97 270 top
SJ15  [SJ_3_PASTE1&2&3]  19.56,37.53 270 top
SJ16  [SJ_3]  9.4,37.53 270 top
SJ17  [SJ_3_PASTE1&2&3]  35.31,37.53 270 top
SJ18  [SJ_3]  25.15,37.53 270 top
SJ19  [SJ_3_PASTE1&2&3]  51.05,37.53 270 top
SJ20  [SJ_3]  40.89,37.53 270 top
SJ21  [SJ_3_PASTE1&2&3]  66.8,37.53 270 top
SJ22  [SJ_3]  56.64,37.53 270 top
SJ23  [SJ_3_PASTE1&2&3]  82.55,37.53 270 top
SJ24  [SJ_3]  72.39,37.53 270 top
SJ25  [SJ_3_PASTE1&2&3]  98.3,37.53 270 top
SJ26  [SJ_3]  88.14,37.53 270 top
SJ27  [SJ_3_PASTE1&2&3]  114.05,37.53 270 top
SJ28  [SJ_3]  103.89,37.53 270 top
SJ29  [SJ_3_PASTE1&2&3]  19.56,57.09 270 top
SJ30  [SJ_3]  9.4,57.09 270 top
SJ31  [SJ_3_PASTE1&2&3]  35.31,57.09 270 top
SJ32  [SJ_3]  25.15,57.09 270 top
SJ33  [SJ_3_PASTE1&2&3]  51.05,57.09 270 top
SJ34  [SJ_3]  40.89,57.09 270 top
SJ35  [SJ_3_PASTE1&2&3]  66.8,57.09 270 top
SJ36  [SJ_3]  56.64,57.09 270 top
SJ37  [SJ_3_PASTE1&2&3]  82.55,57.09 270 top
SJ38  [SJ_3]  72.39,57.09 270 top
SJ39  [SJ_3_PASTE1&2&3]  98.3,57.09 270 top
SJ40  [SJ_3]  88.14,57.09 270 top
SJ41  [SJ_3_PASTE1&2&3]  114.05,57.09 270 top
SJ42  [SJ_3]  103.89,57.09 270 top
SJ43  [SJ_3_PASTE1&2&3]  19.56,76.64 270 top
SJ44  [SJ_3]  9.4,76.64 270 top
SJ45  [SJ_3_PASTE1&2&3]  35.31,76.64 270 top
SJ46  [SJ_3]  25.15,76.64 270 top
SJ47  [SJ_3_PASTE1&2&3]  51.05,76.64 270 top
SJ48  [SJ_3]  40.89,76.64 270 top
SJ49  [SJ_3_PASTE1&2&3]  66.8,76.64 270 top
SJ50  [SJ_3]  56.64,76.64 270 top
SJ51  [SJ_3_PASTE1&2&3]  82.55,76.64 270 top
SJ52  [SJ_3]  72.39,76.64 270 top
SJ53  [SJ_3_PASTE1&2&3]  98.3,76.64 270 top
SJ54  [SJ_3]  88.14,76.64 270 top
SJ55  [SJ_3_PASTE1&2&3]  114.05,76.64 270 top
SJ56  [SJ_3]  103.89,76.64 270 top
SJ57  [SJ_3_PASTE1&2&3]  19.56,96.2 270 top
SJ58  [SJ_3]  9.4,96.2 270 top
SJ59  [SJ_3_PASTE1&2&3]  35.31,96.2 270 top
SJ60  [SJ_3]  25.15,96.2 270 top
SJ61  [SJ_3_PASTE1&2&3]  51.05,96.2 270 top
SJ62  [SJ_3]  40.89,96.2 270 top
SJ63  [SJ_3_PASTE1&2&3]  66.8,96.2 270 top
SJ64  [SJ_3]  56.64,96.2 270 top
SJ65  [SJ_3_PASTE1&2&3]  82.55,96.2 270 top
SJ66  [SJ_3]  72.39,96.2 270 top
SJ67  [SJ_3_PASTE1&2&3]  98.3,96.2 270 top
SJ68  [SJ_3]  88.14,96.2 270 top
SJ69  [SJ_3_PASTE1&2&3]  114.05,96.2 270 top
SJ70  [SJ_3]  103.89,96.2 270 top
STANDOFF1  STAND-OFF  [STAND-OFF]  9.4,23.37 0 top
STANDOFF2  STAND-OFF  [STAND-OFF]  19.56,23.37 0 top
STANDOFF3  STAND-OFF  [STAND-OFF]  25.15,23.37 0 top
STANDOFF4  STAND-OFF  [STAND-OFF]  35.31,23.37 0 top
STANDOFF5  STAND-OFF  [STAND-OFF]  40.89,23.37 0 top
STANDOFF6  STAND-OFF  [STAND-OFF]  51.05,23.37 0 top
STANDOFF7  STAND-OFF  [STAND-OFF]  56.64,23.37 0 top
STANDOFF8  STAND-OFF  [STAND-OFF]  66.8,23.37 0 top
STANDOFF9  STAND-OFF  [STAND-OFF]  72.39,23.37 0 top
STANDOFF10  STAND-OFF  [STAND-OFF]  82.55,23.37 0 top
STANDOFF11  STAND-OFF  [STAND-OFF]  88.14,23.37 0 top
STANDOFF12  STAND-OFF  [STAND-OFF]  98.3,23.37 0 top
STANDOFF13  STAND-OFF  [STAND-OFF]  103.89,23.37 0 top
STANDOFF14  STAND-OFF  [STAND-OFF]  114.05,23.37 0 top
STANDOFF15  STAND-OFF  [STAND-OFF]  9.4,42.93 0 top
STANDOFF16  STAND-OFF  [STAND-OFF]  19.56,42.93 0 top
STANDOFF17  STAND-OFF  [STAND-OFF]  25.15,42.93 0 top
STANDOFF18  STAND-OFF  [STAND-OFF]  35.31,42.93 0 top
STANDOFF19  STAND-OFF  [STAND-OFF]  40.89,42.93 0 top
STANDOFF20  STAND-OFF  [STAND-OFF]  51.05,42.93 0 top
STANDOFF21  STAND-OFF  [STAND-OFF]  56.64,42.93 0 top
STANDOFF22  STAND-OFF  [STAND-OFF]  66.8,42.93 0 top
STANDOFF23  STAND-OFF  [STAND-OFF]  72.39,42.93 0 top
STANDOFF24  STAND-OFF  [STAND-OFF]  82.55,42.93 0 top
STANDOFF25  STAND-OFF  [STAND-OFF]  88.14,42.93 0 top
STANDOFF26  STAND-OFF  [STAND-OFF]  98.3,42.93 0 top
STANDOFF27  STAND-OFF  [STAND-OFF]  103.89,42.93 0 top
STANDOFF28  STAND-OFF  [STAND-OFF]  114.05,42.93 0 top
STANDOFF29  STAND-OFF  [STAND-OFF]  9.4,62.48 0 top
STANDOFF30  STAND-OFF  [STAND-OFF]  19.56,62.48 0 top
STANDOFF31  STAND-OFF  [STAND-OFF]  25.15,62.48 0 top
STANDOFF32  STAND-OFF  [STAND-OFF]  35.31,62.48 0 top
STANDOFF33  STAND-OFF  [STAND-OFF]  40.89,62.48 0 top
STANDOFF34  STAND-OFF  [STAND-OFF]  51.05,62.48 0 top
STANDOFF35  STAND-OFF  [STAND-OFF]  56.64,62.48 0 top
STANDOFF36  STAND-OFF  [STAND-OFF]  66.8,62.48 0 top
STANDOFF37  STAND-OFF  [STAND-OFF]  72.39,62.48 0 top
STANDOFF38  STAND-OFF  [STAND-OFF]  82.55,62.48 0 top
STANDOFF39  STAND-OFF  [STAND-OFF]  88.14,62.48 0 top
STANDOFF40  STAND-OFF  [STAND-OFF]  98.3,62.48 0 top
STANDOFF41  STAND-OFF  [STAND-OFF]  103.89,62.48 0 top
STANDOFF42  STAND-OFF  [STAND-OFF]  114.05,62.48 0 top
STANDOFF43  STAND-OFF  [STAND-OFF]  9.4,82.04 0 top
STANDOFF44  STAND-OFF  [STAND-OFF]  19.56,82.04 0 top
STANDOFF45  STAND-OFF  [STAND-OFF]  25.15,82.04 0 top
STANDOFF46  STAND-OFF  [STAND-OFF]  35.31,82.04 0 top
STANDOFF47  STAND-OFF  [STAND-OFF]  40.89,82.04 0 top
STANDOFF48  STAND-OFF  [STAND-OFF]  51.05,82.04 0 top
STANDOFF49  STAND-OFF  [STAND-OFF]  56.64,82.04 0 top
STANDOFF50  STAND-OFF  [STAND-OFF]  66.8,82.04 0 top
STANDOFF51  STAND-OFF  [STAND-OFF]  72.39,82.04 0 top
STANDOFF52  STAND-OFF  [STAND-OFF]  82.55,82.04 0 top
STANDOFF53  STAND-OFF  [STAND-OFF]  88.14,82.04 0 top
STANDOFF54  STAND-OFF  [STAND-OFF]  98.3,82.04 0 top
STANDOFF55  STAND-OFF  [STAND-OFF]  103.89,82.04 0 top
STANDOFF56  STAND-OFF  [STAND-OFF]  114.05,82.04 0 top
STANDOFF57  STAND-OFF  [STAND-OFF]  9.4,101.6 0 top
STANDOFF58  STAND-OFF  [STAND-OFF]  19.56,101.6 0 top
STANDOFF59  STAND-OFF  [STAND-OFF]  25.15,101.6 0 top
STANDOFF60  STAND-OFF  [STAND-OFF]  35.31,101.6 0 top
STANDOFF61  STAND-OFF  [STAND-OFF]  40.89,101.6 0 top
STANDOFF62  STAND-OFF  [STAND-OFF]  51.05,101.6 0 top
STANDOFF63  STAND-OFF  [STAND-OFF]  56.64,101.6 0 top
STANDOFF64  STAND-OFF  [STAND-OFF]  66.8,101.6 0 top
STANDOFF65  STAND-OFF  [STAND-OFF]  72.39,101.6 0 top
STANDOFF66  STAND-OFF  [STAND-OFF]  82.55,101.6 0 top
STANDOFF67  STAND-OFF  [STAND-OFF]  88.14,101.6 0 top
STANDOFF68  STAND-OFF  [STAND-OFF]  98.3,101.6 0 top
STANDOFF69  STAND-OFF  [STAND-OFF]  103.89,101.6 0 top
STANDOFF70  STAND-OFF  [STAND-OFF]  114.05,101.6 0 top
U1  TSL2561FN  [FN-6]  14.48,17.97 0 top
U2  TSL2561FN  [FN-6]  30.23,17.97 0 top
U3  TSL2561FN  [FN-6]  45.97,17.97 0 top
U4  TSL2561FN  [FN-6]  61.72,17.97 0 top
U5  TSL2561FN  [FN-6]  77.47,17.97 0 top
U6  TSL2561FN  [FN-6]  93.22,17.97 0 top
U7  TSL2561FN  [FN-6]  108.97,17.97 0 top
U8  TSL2561FN  [FN-6]  14.48,37.53 0 top
U9  TSL2561FN  [FN-6]  30.23,37.53 0 top
U10  TSL2561FN  [FN-6]  45.97,37.53 0 top
U11  TSL2561FN  [FN-6]  61.72,37.53 0 top
U12  TSL2561FN  [FN-6]  77.47,37.53 0 top
U13  TSL2561FN  [FN-6]  93.22,37.53 0 top
U14  TSL2561FN  [FN-6]  108.97,37.53 0 top
U15  TSL2561FN  [FN-6]  14.48,57.09 0 top
U16  TSL2561FN  [FN-6]  30.23,57.09 0 top
U17  TSL2561FN  [FN-6]  45.97,57.09 0 top
U18  TSL2561FN  [FN-6]  61.72,57.09 0 top
U19  TSL2561FN  [FN-6]  77.47,57.09 0 top
U20  TSL2561FN  [FN-6]  93.22,57.09 0 top
U21  TSL2561FN  [FN-6]  108.97,57.09 0 top
U22  TSL2561FN  [FN-6]  14.48,76.64 0 top
U23  TSL2561FN  [FN-6]  30.23,76.64 0 top
U24  TSL2561FN  [FN-6]  45.97,76.64 0 top
U25  TSL2561FN  [FN-6]  61.72,76.64 0 top
U26  TSL2561FN  [FN-6]  77.47,76.64 0 top
U27  TSL2561FN  [FN-6]  93.22,76.64 0 top
U28  TSL2561FN  [FN-6]  108.97,76.64 0 top
U29  TSL2561FN  [FN-6]  14.48,96.2 0 top
U30  TSL2561FN  [FN-6]  30.23,96.2 0 top
U31  TSL2561FN  [FN-6]  45.97,96.2 0 top
U32  TSL2561FN  [FN-6]  61.72,96.2 0 top
U33  TSL2561FN  [FN-6]  77.47,96.2 0 top
U34  TSL2561FN  [FN-6]  93.22,96.2 0 top
U35  TSL2561FN  [FN-6]  108.97,96.2 0 top

## Library data of the parts
C1-C35 = SparkFun-Capacitors
E$1 E$4 E$5 FID1-FID70 LOGO1-LOGO105 = SparkFun-Aesthetics
JP1-JP35 SJ1-SJ70 U1-U35 = mike-temp
R1-R140 = SparkFun-Resistors
STANDOFF1-STANDOFF70 = SparkFun-Electromechanical

## Nets
3.3V: C1.1 JP1.4 R1.2 R4.2 SJ1.2 U1.1
3.3V1: C2.1 JP2.4 R5.2 R8.2 SJ3.2 U2.1
3.3V2: C3.1 JP3.4 R9.2 R12.2 SJ5.2 U3.1
3.3V3: C4.1 JP4.4 R13.2 R16.2 SJ7.2 U4.1
3.3V4: C5.1 JP5.4 R17.2 R20.2 SJ9.2 U5.1
3.3V5: C6.1 JP6.4 R21.2 R24.2 SJ11.2 U6.1
3.3V6: C7.1 JP7.4 R25.2 R28.2 SJ13.2 U7.1
3.3V7: C8.1 JP8.4 R29.2 R32.2 SJ15.2 U8.1
3.3V8: C9.1 JP9.4 R33.2 R36.2 SJ17.2 U9.1
3.3V9: C10.1 JP10.4 R37.2 R40.2 SJ19.2 U10.1
3.3V10: C11.1 JP11.4 R41.2 R44.2 SJ21.2 U11.1
3.3V11: C12.1 JP12.4 R45.2 R48.2 SJ23.2 U12.1
3.3V12: C13.1 JP13.4 R49.2 R52.2 SJ25.2 U13.1
3.3V13: C14.1 JP14.4 R53.2 R56.2 SJ27.2 U14.1
3.3V14: C15.1 JP15.4 R57.2 R60.2 SJ29.2 U15.1
3.3V15: C16.1 JP16.4 R61.2 R64.2 SJ31.2 U16.1
3.3V16: C17.1 JP17.4 R65.2 R68.2 SJ33.2 U17.1
3.3V17: C18.1 JP18.4 R69.2 R72.2 SJ35.2 U18.1
3.3V18: C19.1 JP19.4 R73.2 R76.2 SJ37.2 U19.1
3.3V19: C20.1 JP20.4 R77.2 R80.2 SJ39.2 U20.1
3.3V20: C21.1 JP21.4 R81.2 R84.2 SJ41.2 U21.1
3.3V21: C22.1 JP22.4 R85.2 R88.2 SJ43.2 U22.1
3.3V22: C23.1 JP23.4 R89.2 R92.2 SJ45.2 U23.1
3.3V23: C24.1 JP24.4 R93.2 R96.2 SJ47.2 U24.1
3.3V24: C25.1 JP25.4 R97.2 R100.2 SJ49.2 U25.1
3.3V25: C26.1 JP26.4 R101.2 R104.2 SJ51.2 U26.1
3.3V26: C27.1 JP27.4 R105.2 R108.2 SJ53.2 U27.1
3.3V27: C28.1 JP28.4 R109.2 R112.2 SJ55.2 U28.1
3.3V28: C29.1 JP29.4 R113.2 R116.2 SJ57.2 U29.1
3.3V29: C30.1 JP30.4 R117.2 R120.2 SJ59.2 U30.1
3.3V30: C31.1 JP31.4 R121.2 R124.2 SJ61.2 U31.1
3.3V31: C32.1 JP32.4 R125.2 R128.2 SJ63.2 U32.1
3.3V32: C33.1 JP33.4 R129.2 R132.2 SJ65.2 U33.1
3.3V33: C34.1 JP34.4 R133.2 R136.2 SJ67.2 U34.1
3.3V34: C35.1 JP35.4 R137.2 R140.2 SJ69.2 U35.1
GND: C1.2 JP1.3 SJ2.3 U1.3
GND1: C2.2 JP2.3 SJ4.3 U2.3
GND2: C3.2 JP3.3 SJ6.3 U3.3
GND3: C4.2 JP4.3 SJ8.3 U4.3
GND4: C5.2 JP5.3 SJ10.3 U5.3
GND5: C6.2 JP6.3 SJ12.3 U6.3
GND6: C7.2 JP7.3 SJ14.3 U7.3
GND7: C8.2 JP8.3 SJ16.3 U8.3
GND8: C9.2 JP9.3 SJ18.3 U9.3
GND9: C10.2 JP10.3 SJ20.3 U10.3
GND10: C11.2 JP11.3 SJ22.3 U11.3
GND11: C12.2 JP12.3 SJ24.3 U12.3
GND12: C13.2 JP13.3 SJ26.3 U13.3
GND13: C14.2 JP14.3 SJ28.3 U14.3
GND14: C15.2 JP15.3 SJ30.3 U15.3
GND15: C16.2 JP16.3 SJ32.3 U16.3
GND16: C17.2 JP17.3 SJ34.3 U17.3
GND17: C18.2 JP18.3 SJ36.3 U18.3
GND18: C19.2 JP19.3 SJ38.3 U19.3
GND19: C20.2 JP20.3 SJ40.3 U20.3
GND20: C21.2 JP21.3 SJ42.3 U21.3
GND21: C22.2 JP22.3 SJ44.3 U22.3
GND22: C23.2 JP23.3 SJ46.3 U23.3
GND23: C24.2 JP24.3 SJ48.3 U24.3
GND24: C25.2 JP25.3 SJ50.3 U25.3
GND25: C26.2 JP26.3 SJ52.3 U26.3
GND26: C27.2 JP27.3 SJ54.3 U27.3
GND27: C28.2 JP28.3 SJ56.3 U28.3
GND28: C29.2 JP29.3 SJ58.3 U29.3
GND29: C30.2 JP30.3 SJ60.3 U30.3
GND30: C31.2 JP31.3 SJ62.3 U31.3
GND31: C32.2 JP32.3 SJ64.3 U32.3
GND32: C33.2 JP33.3 SJ66.3 U33.3
GND33: C34.2 JP34.3 SJ68.3 U34.3
GND34: C35.2 JP35.3 SJ70.3 U35.3
INT: JP1.5 R4.1 U1.5
INT1: JP2.5 R8.1 U2.5
INT2: JP3.5 R12.1 U3.5
INT3: JP4.5 R16.1 U4.5
INT4: JP5.5 R20.1 U5.5
INT5: JP6.5 R24.1 U6.5
INT6: JP7.5 R28.1 U7.5
INT7: JP8.5 R32.1 U8.5
INT8: JP9.5 R36.1 U9.5
INT9: JP10.5 R40.1 U10.5
INT10: JP11.5 R44.1 U11.5
INT11: JP12.5 R48.1 U12.5
INT12: JP13.5 R52.1 U13.5
INT13: JP14.5 R56.1 U14.5
INT14: JP15.5 R60.1 U15.5
INT15: JP16.5 R64.1 U16.5
INT16: JP17.5 R68.1 U17.5
INT17: JP18.5 R72.1 U18.5
INT18: JP19.5 R76.1 U19.5
INT19: JP20.5 R80.1 U20.5
INT20: JP21.5 R84.1 U21.5
INT21: JP22.5 R88.1 U22.5
INT22: JP23.5 R92.1 U23.5
INT23: JP24.5 R96.1 U24.5
INT24: JP25.5 R100.1 U25.5
INT25: JP26.5 R104.1 U26.5
INT26: JP27.5 R108.1 U27.5
INT27: JP28.5 R112.1 U28.5
INT28: JP29.5 R116.1 U29.5
INT29: JP30.5 R120.1 U30.5
INT30: JP31.5 R124.1 U31.5
INT31: JP32.5 R128.1 U32.5
INT32: JP33.5 R132.1 U33.5
INT33: JP34.5 R136.1 U34.5
INT34: JP35.5 R140.1 U35.5
N$1: R5.1 SJ4.1
N$2: R1.1 SJ2.1
N$3: SJ2.2 U1.2
N$4: SJ4.2 U2.2
N$5: R7.2 SJ3.1
N$6: R6.2 SJ3.3
N$7: R9.1 SJ6.1
N$8: R3.2 SJ1.1
N$9: R2.2 SJ1.3
N$10: SJ6.2 U3.2
N$11: R11.2 SJ5.1
N$12: R10.2 SJ5.3
N$13: R13.1 SJ8.1
N$14: SJ8.2 U4.2
N$15: R15.2 SJ7.1
N$16: R14.2 SJ7.3
N$17: R17.1 SJ10.1
N$18: SJ10.2 U5.2
N$19: R19.2 SJ9.1
N$20: R18.2 SJ9.3
N$21: R21.1 SJ12.1
N$22: SJ12.2 U6.2
N$23: R23.2 SJ11.1
N$24: R22.2 SJ11.3
N$25: R25.1 SJ14.1
N$26: SJ14.2 U7.2
N$27: R27.2 SJ13.1
N$28: R26.2 SJ13.3
N$29: R29.1 SJ16.1
N$30: SJ16.2 U8.2
N$31: R31.2 SJ15.1
N$32: R30.2 SJ15.3
N$33: R33.1 SJ18.1
N$34: SJ18.2 U9.2
N$35: R35.2 SJ17.1
N$36: R34.2 SJ17.3
N$37: R37.1 SJ20.1
N$38: SJ20.2 U10.2
N$39: R39.2 SJ19.1
N$40: R38.2 SJ19.3
N$41: R41.1 SJ22.1
N$42: SJ22.2 U11.2
N$43: R43.2 SJ21.1
N$44: R42.2 SJ21.3
N$45: R45.1 SJ24.1
N$46: SJ24.2 U12.2
N$47: R47.2 SJ23.1
N$48: R46.2 SJ23.3
N$49: R49.1 SJ26.1
N$50: SJ26.2 U13.2
N$51: R51.2 SJ25.1
N$52: R50.2 SJ25.3
N$53: R53.1 SJ28.1
N$54: SJ28.2 U14.2
N$55: R55.2 SJ27.1
N$56: R54.2 SJ27.3
N$57: R57.1 SJ30.1
N$58: SJ30.2 U15.2
N$59: R59.2 SJ29.1
N$60: R58.2 SJ29.3
N$61: R61.1 SJ32.1
N$62: SJ32.2 U16.2
N$63: R63.2 SJ31.1
N$64: R62.2 SJ31.3
N$65: R65.1 SJ34.1
N$66: SJ34.2 U17.2
N$67: R67.2 SJ33.1
N$68: R66.2 SJ33.3
N$69: R69.1 SJ36.1
N$70: SJ36.2 U18.2
N$71: R71.2 SJ35.1
N$72: R70.2 SJ35.3
N$73: R73.1 SJ38.1
N$74: SJ38.2 U19.2
N$75: R75.2 SJ37.1
N$76: R74.2 SJ37.3
N$77: R77.1 SJ40.1
N$78: SJ40.2 U20.2
N$79: R79.2 SJ39.1
N$80: R78.2 SJ39.3
N$81: R81.1 SJ42.1
N$82: SJ42.2 U21.2
N$83: R83.2 SJ41.1
N$84: R82.2 SJ41.3
N$85: R85.1 SJ44.1
N$86: SJ44.2 U22.2
N$87: R87.2 SJ43.1
N$88: R86.2 SJ43.3
N$89: R89.1 SJ46.1
N$90: SJ46.2 U23.2
N$91: R91.2 SJ45.1
N$92: R90.2 SJ45.3
N$93: R93.1 SJ48.1
N$94: SJ48.2 U24.2
N$95: R95.2 SJ47.1
N$96: R94.2 SJ47.3
N$97: R97.1 SJ50.1
N$98: SJ50.2 U25.2
N$99: R99.2 SJ49.1
N$100: R98.2 SJ49.3
N$101: R101.1 SJ52.1
N$102: SJ52.2 U26.2
N$103: R103.2 SJ51.1
N$104: R102.2 SJ51.3
N$105: R105.1 SJ54.1
N$106: SJ54.2 U27.2
N$107: R107.2 SJ53.1
N$108: R106.2 SJ53.3
N$109: R109.1 SJ56.1
N$110: SJ56.2 U28.2
N$111: R111.2 SJ55.1
N$112: R110.2 SJ55.3
N$113: R113.1 SJ58.1
N$114: SJ58.2 U29.2
N$115: R115.2 SJ57.1
N$116: R114.2 SJ57.3
N$117: R117.1 SJ60.1
N$118: SJ60.2 U30.2
N$119: R119.2 SJ59.1
N$120: R118.2 SJ59.3
N$121: R121.1 SJ62.1
N$122: SJ62.2 U31.2
N$123: R123.2 SJ61.1
N$124: R122.2 SJ61.3
N$125: R125.1 SJ64.1
N$126: SJ64.2 U32.2
N$127: R127.2 SJ63.1
N$128: R126.2 SJ63.3
N$129: R129.1 SJ66.1
N$130: SJ66.2 U33.2
N$131: R131.2 SJ65.1
N$132: R130.2 SJ65.3
N$133: R133.1 SJ68.1
N$134: SJ68.2 U34.2
N$135: R135.2 SJ67.1
N$136: R134.2 SJ67.3
N$137: R137.1 SJ70.1
N$138: SJ70.2 U35.2
N$139: R139.2 SJ69.1
N$140: R138.2 SJ69.3
SCL: JP1.2 R2.1 U1.4
SCL1: JP2.2 R6.1 U2.4
SCL2: JP3.2 R10.1 U3.4
SCL3: JP4.2 R14.1 U4.4
SCL4: JP5.2 R18.1 U5.4
SCL5: JP6.2 R22.1 U6.4
SCL6: JP7.2 R26.1 U7.4
SCL7: JP8.2 R30.1 U8.4
SCL8: JP9.2 R34.1 U9.4
SCL9: JP10.2 R38.1 U10.4
SCL10: JP11.2 R42.1 U11.4
SCL11: JP12.2 R46.1 U12.4
SCL12: JP13.2 R50.1 U13.4
SCL13: JP14.2 R54.1 U14.4
SCL14: JP15.2 R58.1 U15.4
SCL15: JP16.2 R62.1 U16.4
SCL16: JP17.2 R66.1 U17.4
SCL17: JP18.2 R70.1 U18.4
SCL18: JP19.2 R74.1 U19.4
SCL19: JP20.2 R78.1 U20.4
SCL20: JP21.2 R82.1 U21.4
SCL21: JP22.2 R86.1 U22.4
SCL22: JP23.2 R90.1 U23.4
SCL23: JP24.2 R94.1 U24.4
SCL24: JP25.2 R98.1 U25.4
SCL25: JP26.2 R102.1 U26.4
SCL26: JP27.2 R106.1 U27.4
SCL27: JP28.2 R110.1 U28.4
SCL28: JP29.2 R114.1 U29.4
SCL29: JP30.2 R118.1 U30.4
SCL30: JP31.2 R122.1 U31.4
SCL31: JP32.2 R126.1 U32.4
SCL32: JP33.2 R130.1 U33.4
SCL33: JP34.2 R134.1 U34.4
SCL34: JP35.2 R138.1 U35.4
SDA: JP1.1 R3.1 U1.6
SDA1: JP2.1 R7.1 U2.6
SDA2: JP3.1 R11.1 U3.6
SDA3: JP4.1 R15.1 U4.6
SDA4: JP5.1 R19.1 U5.6
SDA5: JP6.1 R23.1 U6.6
SDA6: JP7.1 R27.1 U7.6
SDA7: JP8.1 R31.1 U8.6
SDA8: JP9.1 R35.1 U9.6
SDA9: JP10.1 R39.1 U10.6
SDA10: JP11.1 R43.1 U11.6
SDA11: JP12.1 R47.1 U12.6
SDA12: JP13.1 R51.1 U13.6
SDA13: JP14.1 R55.1 U14.6
SDA14: JP15.1 R59.1 U15.6
SDA15: JP16.1 R63.1 U16.6
SDA16: JP17.1 R67.1 U17.6
SDA17: JP18.1 R71.1 U18.6
SDA18: JP19.1 R75.1 U19.6
SDA19: JP20.1 R79.1 U20.6
SDA20: JP21.1 R83.1 U21.6
SDA21: JP22.1 R87.1 U22.6
SDA22: JP23.1 R91.1 U23.6
SDA23: JP24.1 R95.1 U24.6
SDA24: JP25.1 R99.1 U25.6
SDA25: JP26.1 R103.1 U26.6
SDA26: JP27.1 R107.1 U27.6
SDA27: JP28.1 R111.1 U28.6
SDA28: JP29.1 R115.1 U29.6
SDA29: JP30.1 R119.1 U30.6
SDA30: JP31.1 R123.1 U31.6
SDA31: JP32.1 R127.1 U32.6
SDA32: JP33.1 R131.1 U33.6
SDA33: JP34.1 R135.1 U34.6
SDA34: JP35.1 R139.1 U35.6